# Altium PCB main.PcbDoc (part 2 of 2)
Units mil, origin at the board's own origin, x right, y up, seen from the top; angles counter-clockwise.
Board outline 2900 x 2350 mil, 2 copper layers (Top Layer, Bottom Layer); 128 components, 79 nets, 285 pads, 6 vias.
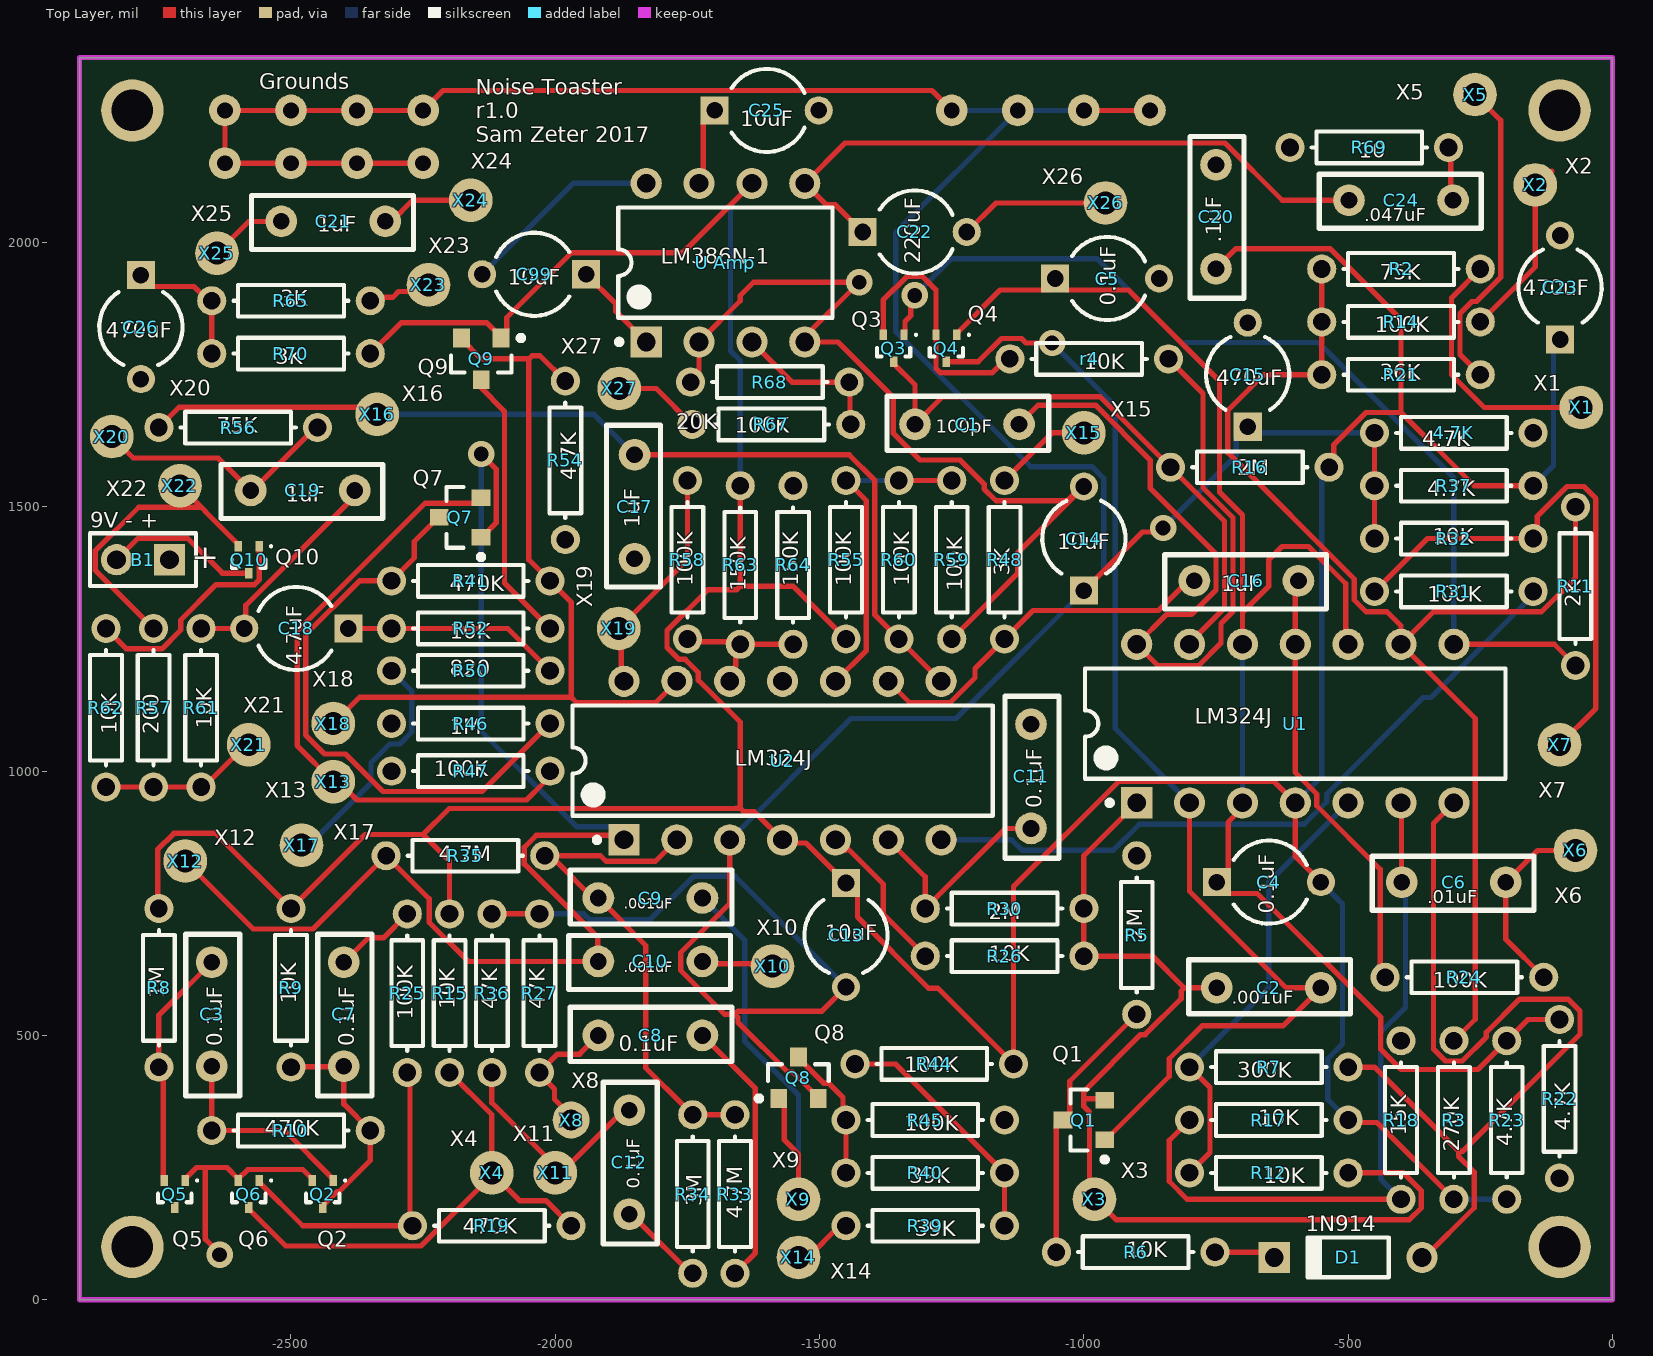
[diagram p0: Top Layer view]

## Part data (continued)
R18: library part Res1, "Resistor", Manufacturer="Vishay / Dale", Manufacturer Part Number=CMF5515K000FHEB, Operating Temperature Range="- 55 C to + 175 C", Power Rating="500 mW (1/2 W)", Resistance="15 kOhms", Supplier Part Number 1=71-CMF5515K000FHEB, Temperature Coefficient="50 PPM / C", Tolerance="1 %", Voltage Rating="250 V", Brand="Vishay / Dale", Category="Metal Film Resistors - Through Hole", ComponentLink1Description=http://www.mouser.com/ds/2/427/cmfind-239942.pdf, ComponentLink1URL=http://www.mouser.com/ds/2/427/cmfind-239942.pdf, Diameter="2.29 mm", LatestRevisionDate=17-Jul-2002, LatestRevisionNote="Re-released for DXP Platform.", Lead Diameter="0.64 mm", Length="6.1 mm", Minimum Order Quantity=1, PackageDescription="Axial Device, Thru-Hole; 2 Leads; 0.3 in Pin Spacing", PackageReference=AXIAL-0.3, Packaging=Reel, Pricing 1="1=0.350, 50=0.266, 100=0.168, 500=0.144, 1000=0.100, 2000=0.093, 5000=0.084, 10000=0.082, 25000=0.080 (USD)", Product="Metal Film Resistors Controlled Temp Coefficient", Published=8-Jun-2000, Publisher="Altium Limited", Reeling=True, RoHS="RoHS Compliant", RoHS - Mouser=Y, Series="CMF Industrial", Standard Pack Qty=1000, Stock 1=2476, Supplier 1=Mouser, Termination Style=Axial, Type="Metal Film Resistors, Industrial, Precision"
R21: library part Res1, "Resistor", Manufacturer="KOA Speer", Manufacturer Part Number=MF1/4DC3602F, Operating Temperature Range="- 55 C to + 155 C", Power Rating="250 mW (1/4 W)", Resistance="36 kOhms", Supplier Part Number 1=660-MF1/4DC3602F, Temperature Coefficient="100 PPM / C", Tolerance="1 %", Voltage Rating="500 V", Brand="KOA Speer", Category="Metal Film Resistors - Through Hole", ComponentLink1Description=http://www.mouser.com/ds/2/219/MF-MFS-RK-18760.pdf, ComponentLink1URL=http://www.mouser.com/ds/2/219/MF-MFS-RK-18760.pdf, Diameter="2.3 mm", LatestRevisionDate=17-Jul-2002, LatestRevisionNote="Re-released for DXP Platform.", Lead Spacing="30 mm", Length="7.1 mm", Minimum Order Quantity=1, PackageDescription="Axial Device, Thru-Hole; 2 Leads; 0.3 in Pin Spacing", PackageReference=AXIAL-0.3, Packaging=Bulk, Pricing 1="1=0.230, 10=0.055, 100=0.019, 1000=0.014, 2000=0.009, 10000=0.008, 25000=0.007, 50000=0.006 (USD)", Product="Metal Film Resistors General Purpose", Published=8-Jun-2000, Publisher="Altium Limited", Reeling=False, RoHS="RoHS Compliant", RoHS - Mouser=Y, Series=MF, Standard Pack Qty=1000, Stock 1=7576, Supplier 1=Mouser, Termination Style=Axial, Type="Semi-precision metal film resistors"
R24 R31: library part Res1, "Resistor", Manufacturer="Vishay / Dale", Manufacturer Part Number=CMF55100K00FHEK, Operating Temperature Range="- 55 C to + 175 C", Power Rating="500 mW (1/2 W)", Resistance="100 kOhms", Supplier Part Number 1=71-CMF55100K00BEEB, Temperature Coefficient="50 PPM / C", Tolerance="1 %", Voltage Rating="250 V", Brand="Vishay / Dale", Category="Metal Film Resistors - Through Hole", ComponentLink1Description=http://www.mouser.com/ds/2/427/cmfind-239942.pdf, ComponentLink1URL=http://www.mouser.com/ds/2/427/cmfind-239942.pdf, Diameter="2.29 mm", LatestRevisionDate=17-Jul-2002, LatestRevisionNote="Re-released for DXP Platform.", Lead Diameter="0.64 mm", Length="6.1 mm", Minimum Order Quantity=1, PackageDescription="Axial Device, Thru-Hole; 2 Leads; 0.3 in Pin Spacing", PackageReference=AXIAL-0.3, Packaging=Bulk, Pricing 1="1=0.230, 25=0.181, 100=0.132, 500=0.115, 1000=0.099, 2000=0.092, 5000=0.087, 10000=0.082, 25000=0.072 (USD)", Pricing 2="1=0.710, 50=0.650, 100=0.491, 500=0.408, 1000=0.302, 2000=0.294, 5000=0.288, 10000=0.279, 25000=0.272 (USD)", Product="Metal Film Resistors Controlled Temp Coefficient", Published=8-Jun-2000, Publisher="Altium Limited", Reeling=False, RoHS="RoHS Compliant", RoHS - Mouser=Y, Series="CMF Industrial", Standard Pack Qty=100, Stock 1=4041, Stock 2=1499, Supplier 1=Mouser, Supplier Part Number 2=71-CMF55100K00BEEB, Termination Style=Axial, Type="Metal Film Resistors, Industrial, Precision"
R27: library part Res1, "Resistor", Manufacturer Part Number=CMF5547K000FHEK, Supplier Part Number 1=71-CMF5547K000FHEK, Category="Metal Film Resistors - Through Hole", ComponentLink1Description=http://www.mouser.com/ds/2/427/cmfind-239942.pdf, ComponentLink1URL=http://www.mouser.com/ds/2/427/cmfind-239942.pdf, Diameter="2.29 mm", LatestRevisionDate=17-Jul-2002, LatestRevisionNote="Re-released for DXP Platform.", Lead Diameter="0.64 mm", PackageDescription="Axial Device, Thru-Hole; 2 Leads; 0.3 in Pin Spacing", PackageReference=AXIAL-0.3, Published=8-Jun-2000, Publisher="Altium Limited", Supplier 1=Mouser
R30: library part Res1, "Resistor", Manufacturer="Vishay / Dale", Manufacturer Part Number=CMF5512M000FKEK, Maximum Operating Temperature="+ 175 C", Minimum Operating Temperature="- 55 C", Operating Temperature Range="- 55 C to + 175 C", Power Rating="500 mW", Resistance="12 MOhms", Supplier Part Number 1=71-CMF5512M000FKEK, Temperature Coefficient="100 PPM / C", Tolerance="1 %", Voltage Rating="250 V", Brand="Vishay / Dale", Category="Metal Film Resistors - Through Hole", ComponentLink1Description=http://www.mouser.com/ds/2/427/cmfind-239942.pdf, ComponentLink1URL=http://www.mouser.com/ds/2/427/cmfind-239942.pdf, Diameter="2.29 mm", LatestRevisionDate=17-Jul-2002, LatestRevisionNote="Re-released for DXP Platform.", Length="6.1 mm", Minimum Order Quantity=1, PackageDescription="Axial Device, Thru-Hole; 2 Leads; 0.3 in Pin Spacing", PackageReference=AXIAL-0.3, Packaging=Bulk, Pricing 1="1=1.59, 5=1.47, 10=1.40, 25=1.27, 50=1.21, 100=1.15, 200=0.990, 500=0.960, 1000=0.920 (USD)", Product="Metal Film Resistors Controlled Temp Coefficient", Product Status="New at Mouser", Published=8-Jun-2000, Publisher="Altium Limited", Reeling=False, RoHS="RoHS Compliant", RoHS - Mouser=Y, Series="CMF Industrial", Standard Pack Qty=100, Stock 1=94, Supplier 1=Mouser, Termination Style=Axial, Type="Metal Film Resistors, Industrial, Precision"
R33: library part Res1, "Resistor", Supplier Part Number 1=660-CFS1/4CT52R475J, LatestRevisionDate=17-Jul-2002, LatestRevisionNote="Re-released for DXP Platform.", PackageDescription="Axial Device, Thru-Hole; 2 Leads; 0.3 in Pin Spacing", PackageReference=AXIAL-0.3, Published=8-Jun-2000, Publisher="Altium Limited", Supplier 1=Mouser
R34: library part Res1, "Resistor", Manufacturer="Vishay / Dale", Manufacturer Part Number=CMF553M0000FKEK, Operating Temperature Range="- 55 C to + 175 C", Power Rating="500 mW (1/2 W)", Resistance="3 MOhms", Supplier Part Number 1=71-CMF553M0000FKEK, Temperature Coefficient="100 PPM / C", Tolerance="1 %", Voltage Rating="250 V", Brand="Vishay / Dale", Category="Metal Film Resistors - Through Hole", ComponentLink1Description=http://www.mouser.com/ds/2/427/cmfind-239942.pdf, ComponentLink1URL=http://www.mouser.com/ds/2/427/cmfind-239942.pdf, Diameter="2.29 mm", LatestRevisionDate=17-Jul-2002, LatestRevisionNote="Re-released for DXP Platform.", Lead Diameter="0.64 mm", Length="6.1 mm", Minimum Order Quantity=1, PackageDescription="Axial Device, Thru-Hole; 2 Leads; 0.3 in Pin Spacing", PackageReference=AXIAL-0.3, Packaging=Bulk, Pricing 1="1=0.510, 50=0.503, 100=0.493, 500=0.481, 1000=0.418, 2000=0.405, 5000=0.393, 10000=0.381, 25000=0.380 (USD)", Product="Metal Film Resistors Controlled Temp Coefficient", Published=8-Jun-2000, Publisher="Altium Limited", Reeling=False, RoHS="RoHS Compliant", RoHS - Mouser=Y, Series="CMF Industrial", Standard Pack Qty=100, Stock 1=575, Supplier 1=Mouser, Termination Style=Axial, Type="Metal Film Resistors, Industrial, Precision"
R35: library part Res1, "Resistor", Manufacturer="KOA Speer", Manufacturer Part Number=CFS1/4CT52R475J, Operating Temperature Range="- 55 C to + 155 C", Power Rating="250 mW (1/4 W)", Resistance="4.7 MOhms", Supplier Part Number 1=660-CFS1/4CT52R475J, Tolerance="5 %", Voltage Rating="250 V", Brand="KOA Speer", Category="Carbon Film Resistors - Through Hole", ComponentLink1Description=http://www.mouser.com/ds/2/219/CF-6922.pdf, ComponentLink1URL=http://www.mouser.com/ds/2/219/CF-6922.pdf, Diameter="1.7 mm", LatestRevisionDate=17-Jul-2002, LatestRevisionNote="Re-released for DXP Platform.", Length="3.2 mm", Minimum Order Quantity=1, PackageDescription="Axial Device, Thru-Hole; 2 Leads; 0.3 in Pin Spacing", PackageReference=AXIAL-0.3, Packaging=Reel, Pricing 1="1=0.150, 5000=0.030, 10000=0.018, 50000=0.014, 100000=0.010 (USD)", Published=8-Jun-2000, Publisher="Altium Limited", Qualification=AEC-Q200, Reeling=True, RoHS="RoHS Compliant", RoHS - Mouser=Y, Series=CF, Standard Pack Qty=5000, Stock 1=14824, Supplier 1=Mouser, Termination Style=Axial, Type="Carbon Film Leaded Resistor"
R36: library part Res1, "Resistor", Manufacturer="Vishay / Dale", Manufacturer Part Number=CMF5547K000FHEK, Operating Temperature Range="- 55 C to + 175 C", Power Rating="500 mW (1/2 W)", Resistance="47 kOhms", Supplier Part Number 1=71-CMF5547K000FHEK, Temperature Coefficient="50 PPM / C", Tolerance="1 %", Voltage Rating="250 V", Brand="Vishay / Dale", Category="Metal Film Resistors - Through Hole", ComponentLink1Description=http://www.mouser.com/ds/2/427/cmfind-239942.pdf, ComponentLink1URL=http://www.mouser.com/ds/2/427/cmfind-239942.pdf, Diameter="2.29 mm", LatestRevisionDate=17-Jul-2002, LatestRevisionNote="Re-released for DXP Platform.", Lead Diameter="0.64 mm", Length="6.1 mm", Minimum Order Quantity=1, PackageDescription="Axial Device, Thru-Hole; 2 Leads; 0.3 in Pin Spacing", PackageReference=AXIAL-0.3, Packaging=Bulk, Pricing 1="1=0.420, 25=0.242, 100=0.152, 500=0.131, 1000=0.100, 2000=0.093, 5000=0.084 (USD)", Product="Metal Film Resistors Controlled Temp Coefficient", Published=8-Jun-2000, Publisher="Altium Limited", Reeling=False, RoHS="RoHS Compliant", RoHS - Mouser=Y, Series="CMF Industrial", Standard Pack Qty=100, Stock 1=569, Supplier 1=Mouser, Termination Style=Axial, Type="Metal Film Resistors, Industrial, Precision"
R39 R40: library part Res1, "Resistor", Manufacturer="Vishay / Dale", Manufacturer Part Number=CMF5539K200DHR6, Operating Temperature Range="- 55 C to + 175 C", Power Rating="500 mW (1/2 W)", Resistance="39.2 kOhms", Supplier Part Number 1=71-CMF5539K200DHR6, Temperature Coefficient="50 PPM / C", Tolerance="0.5 %", Voltage Rating="250 V", Brand="Vishay / Dale", Category="Metal Film Resistors - Through Hole", ComponentLink1Description=http://www.mouser.com/ds/2/427/cmfind-239942.pdf, ComponentLink1URL=http://www.mouser.com/ds/2/427/cmfind-239942.pdf, Diameter="2.29 mm", LatestRevisionDate=17-Jul-2002, LatestRevisionNote="Re-released for DXP Platform.", Length="6.1 mm", Minimum Order Quantity=1, PackageDescription="Axial Device, Thru-Hole; 2 Leads; 0.3 in Pin Spacing", PackageReference=AXIAL-0.3, Packaging=Reel, Pricing 1="1=0.230, 50=0.225, 100=0.220, 500=0.193, 1000=0.181, 4000=0.171, 8000=0.160, 12000=0.146, 20000=0.135 (USD)", Product="Metal Film Resistors Controlled Temp Coefficient", Published=8-Jun-2000, Publisher="Altium Limited", Reeling=True, RoHS=No, RoHS - Mouser=N, Series="CMF Industrial", Standard Pack Qty=1000, Stock 1=502, Supplier 1=Mouser, Termination Style=Axial, Type="Metal Film Resistors, Industrial, Precision"
R48 R65 R70: library part Res1, "Resistor", Manufacturer="Vishay / Dale", Manufacturer Part Number=CMF073K0000JNEK, Operating Temperature Range="- 55 C to + 175 C", Power Rating="500 mW (1/2 W)", Resistance="3 kOhms", Supplier Part Number 1=71-CMF073K0000JNEK, Temperature Coefficient="200 PPM / C", Tolerance="5 %", Voltage Rating="250 V", Brand="Vishay / Dale", Category="Metal Film Resistors - Through Hole", ComponentLink1Description=http://www.mouser.com/ds/2/427/cmfind-239942.pdf, ComponentLink1URL=http://www.mouser.com/ds/2/427/cmfind-239942.pdf, Diameter="2.29 mm", LatestRevisionDate=17-Jul-2002, LatestRevisionNote="Re-released for DXP Platform.", Lead Diameter="0.64 mm", Length="6.1 mm", Minimum Order Quantity=1, PackageDescription="Axial Device, Thru-Hole; 2 Leads; 0.3 in Pin Spacing", PackageReference=AXIAL-0.3, Packaging=Bulk, Pricing 1="1=0.450, 25=0.324, 50=0.198, 100=0.147, 500=0.106, 1000=0.082, 2500=0.078, 5000=0.077, 10000=0.075 (USD)", Product="Metal Film Resistors Controlled Temp Coefficient", Published=8-Jun-2000, Publisher="Altium Limited", Reeling=False, RoHS="RoHS Compliant", RoHS - Mouser=Y, Series="CMF Industrial", Standard Pack Qty=100, Stock 1=1543, Supplier 1=Mouser, Termination Style=Axial, Type="Metal Film Resistors, Industrial, Precision"
R50: library part Res1, "Resistor", Manufacturer="KOA Speer", Manufacturer Part Number=CF1/2C821J, Operating Temperature Range="- 55 C to + 155 C", Power Rating="500 mW (1/2 W)", Resistance="820 Ohms", Supplier Part Number 1=660-CF1/2C821J, Temperature Coefficient="- 450 PPM / C, + 350 PPM / C", Tolerance="5 %", Voltage Rating="400 V", Brand="KOA Speer", Category="Carbon Film Resistors - Through Hole", ComponentLink1Description=http://www.mouser.com/ds/2/219/CF-6922.pdf, ComponentLink1URL=http://www.mouser.com/ds/2/219/CF-6922.pdf, Diameter="3 mm", LatestRevisionDate=17-Jul-2002, LatestRevisionNote="Re-released for DXP Platform.", Length="8.5 mm", Minimum Order Quantity=1, PackageDescription="Axial Device, Thru-Hole; 2 Leads; 0.3 in Pin Spacing", PackageReference=AXIAL-0.3, Packaging=Bulk, Pricing 1="1=0.370, 100=0.058, 500=0.035, 1000=0.025, 5000=0.020, 10000=0.018, 25000=0.015, 50000=0.013, 100000=0.012 (USD)", Published=8-Jun-2000, Publisher="Altium Limited", Qualification=AEC-Q200, Reeling=False, RoHS="RoHS Compliant", RoHS - Mouser=Y, Series=CF, Standard Pack Qty=1000, Stock 1=13076, Supplier 1=Mouser, Termination Style=Axial, Type="Carbon Film Leaded Resistor"
R55 R59 R60: library part Res1, "Resistor", Manufacturer="Vishay / Dale", Manufacturer Part Number=CMF55100K00FHEK, Operating Temperature Range="- 55 C to + 175 C", Power Rating="500 mW (1/2 W)", Resistance="100 kOhms", Supplier Part Number 1=71-CMF50100K00FHEB, Temperature Coefficient="50 PPM / C", Tolerance="1 %", Voltage Rating="250 V", Brand="Vishay / Dale", Category="Metal Film Resistors - Through Hole", ComponentLink1Description=http://www.mouser.com/ds/2/427/cmfind-239942.pdf, ComponentLink1URL=http://www.mouser.com/ds/2/427/cmfind-239942.pdf, Diameter="2.29 mm", LatestRevisionDate=17-Jul-2002, LatestRevisionNote="Re-released for DXP Platform.", Lead Diameter="0.64 mm", Length="6.1 mm", Minimum Order Quantity=1, PackageDescription="Axial Device, Thru-Hole; 2 Leads; 0.3 in Pin Spacing", PackageReference=AXIAL-0.3, Packaging=Bulk, Pricing 1="1=0.230, 25=0.181, 100=0.132, 500=0.115, 1000=0.099, 2000=0.092, 5000=0.087, 10000=0.082, 25000=0.072 (USD)", Pricing 2="1=0.770, 10=0.460, 50=0.400, 100=0.287, 500=0.233, 1000=0.168, 2000=0.163, 5000=0.160, 10000=0.153 (USD)", Product="Metal Film Resistors Controlled Temp Coefficient", Published=8-Jun-2000, Publisher="Altium Limited", Reeling=False, RoHS="RoHS Compliant", RoHS - Mouser=Y, Series="CMF Industrial", Standard Pack Qty=100, Stock 1=4041, Stock 2=935, Supplier 1=Mouser, Supplier Part Number 2=71-CMF50100K00FHEB, Termination Style=Axial, Type="Metal Film Resistors, Industrial, Precision"
R56: library part Res1, "Resistor", Manufacturer=Yageo, Manufacturer Part Number=FMP200FRF52-75K, Operating Temperature Range="- 55 C to + 175 C", Power Rating="500 mW (1/2 W)", Resistance="5 kOhms", Supplier Part Number 1=71-CMF075K0000JNEK, Temperature Coefficient="200 PPM / C", Tolerance="5 %", Voltage Rating="250 V", Brand="Vishay / Dale", Category="Metal Film Resistors - Through Hole", ComponentLink1Description=http://www.mouser.com/ds/2/427/cmfind-239942.pdf, ComponentLink1URL=http://www.mouser.com/ds/2/427/cmfind-239942.pdf, Diameter="2.29 mm", LatestRevisionDate=17-Jul-2002, LatestRevisionNote="Re-released for DXP Platform.", Lead Diameter="0.64 mm", Length="6.1 mm", Minimum Order Quantity=1, PackageDescription="Axial Device, Thru-Hole; 2 Leads; 0.3 in Pin Spacing", PackageReference=AXIAL-0.3, Packaging=Bulk, Pricing 1="1=0.320, 25=0.300, 50=0.184, 100=0.116, 500=0.099, 1000=0.076, 2500=0.071, 5000=0.064 (USD)", Product="Metal Film Resistors Controlled Temp Coefficient", Published=8-Jun-2000, Publisher="Altium Limited", Reeling=False, RoHS="RoHS Compliant", RoHS - Mouser=Y, Series="CMF Industrial", Standard Pack Qty=100, Stock 1=227, Supplier 1=Mouser, Termination Style=Axial, Type="Metal Film Resistors, Industrial, Precision"
R57: library part Res1, "Resistor", Manufacturer="Vishay / Dale", Manufacturer Part Number=CMF50200R00FHEB, Operating Temperature Range="- 55 C to + 175 C", Power Rating="250 mW (1/4 W)", Resistance="200 Ohms", Supplier Part Number 1=71-CMF50200R00FHEB, Temperature Coefficient="50 PPM / C", Tolerance="1 %", Voltage Rating="200 V", Brand="Vishay / Dale", Category="Metal Film Resistors - Through Hole", ComponentLink1Description=http://www.mouser.com/ds/2/427/cmfind-239942.pdf, ComponentLink1URL=http://www.mouser.com/ds/2/427/cmfind-239942.pdf, Diameter="1.65 mm", LatestRevisionDate=17-Jul-2002, LatestRevisionNote="Re-released for DXP Platform.", Lead Diameter="0.41 mm", Length="3.81 mm", Minimum Order Quantity=1, PackageDescription="Axial Device, Thru-Hole; 2 Leads; 0.3 in Pin Spacing", PackageReference=AXIAL-0.3, Packaging=Reel, Pricing 1="1=0.390, 50=0.338, 100=0.278, 500=0.242, 1000=0.217, 2000=0.193, 5000=0.187, 10000=0.181, 25000=0.175 (USD)", Product="Metal Film Resistors Controlled Temp Coefficient", Published=8-Jun-2000, Publisher="Altium Limited", Reeling=True, RoHS="RoHS Compliant", RoHS - Mouser=Y, Series="CMF Industrial", Standard Pack Qty=1000, Stock 1=881, Supplier 1=Mouser, Termination Style=Axial, Type="Metal Film Resistors, Industrial, Precision"
R63 R64: library part Res1, "Resistor", Manufacturer="Vishay / Dale", Manufacturer Part Number=CMF55150K00DHR6, Operating Temperature Range="- 55 C to + 175 C", Power Rating="500 mW (1/2 W)", Resistance="150 kOhms", Supplier Part Number 1=71-CMF55150K00DHR6, Temperature Coefficient="50 PPM / C", Tolerance="0.5 %", Voltage Rating="250 V", Brand="Vishay / Dale", Category="Metal Film Resistors - Through Hole", ComponentLink1Description=http://www.mouser.com/ds/2/427/cmfind-239942.pdf, ComponentLink1URL=http://www.mouser.com/ds/2/427/cmfind-239942.pdf, Diameter="2.29 mm", LatestRevisionDate=17-Jul-2002, LatestRevisionNote="Re-released for DXP Platform.", Length="6.1 mm", Minimum Order Quantity=1, PackageDescription="Axial Device, Thru-Hole; 2 Leads; 0.3 in Pin Spacing", PackageReference=AXIAL-0.3, Packaging=Reel, Pricing 1="1=0.230, 50=0.225, 100=0.220, 500=0.193, 1000=0.181, 4000=0.171, 8000=0.160, 12000=0.146, 20000=0.135 (USD)", Product="Metal Film Resistors Controlled Temp Coefficient", Published=8-Jun-2000, Publisher="Altium Limited", Reeling=True, RoHS=No, RoHS - Mouser=N, Series="CMF Industrial", Standard Pack Qty=1000, Stock 1=987, Supplier 1=Mouser, Termination Style=Axial, Type="Metal Film Resistors, Industrial, Precision"
R68: library part Res1, "Resistor", Manufacturer="Vishay / Dale", Manufacturer Part Number=CMF5520K000FHEB, Operating Temperature Range="- 55 C to + 175 C", Power Rating="500 mW (1/2 W)", Resistance="20 kOhms", Supplier Part Number 1=71-CMF5520K000FHEB, Temperature Coefficient="50 PPM / C", Tolerance="1 %", Voltage Rating="250 V", Brand="Vishay / Dale", Category="Metal Film Resistors - Through Hole", ComponentLink1Description=http://www.mouser.com/ds/2/427/cmfind-239942.pdf, ComponentLink1URL=http://www.mouser.com/ds/2/427/cmfind-239942.pdf, Diameter="2.29 mm", LatestRevisionDate=17-Jul-2002, LatestRevisionNote="Re-released for DXP Platform.", Lead Diameter="0.64 mm", Length="6.1 mm", Minimum Order Quantity=1, PackageDescription="Axial Device, Thru-Hole; 2 Leads; 0.3 in Pin Spacing", PackageReference=AXIAL-0.3, Packaging=Reel, Pricing 1="1=0.350, 50=0.266, 100=0.168, 500=0.144, 1000=0.100, 2000=0.093, 5000=0.084, 10000=0.082, 25000=0.080 (USD)", Product="Metal Film Resistors Controlled Temp Coefficient", Published=8-Jun-2000, Publisher="Altium Limited", Reeling=True, RoHS="RoHS Compliant", RoHS - Mouser=Y, Series="CMF Industrial", Standard Pack Qty=1000, Stock 1=2368, Supplier 1=Mouser, Termination Style=Axial, Type="Metal Film Resistors, Industrial, Precision"
R69: library part Res1, "Metal Film Resistors - Through Hole 1/4watt 10Kohms 5% Rated to 1/2watt", Manufacturer="Vishay / Dale", Manufacturer Part Number=CMF5010R000FHEB, Operating Temperature Range="- 55 C to + 175 C", Power Rating="250 mW (1/4 W)", Resistance="10 Ohms", Supplier Part Number 1=71-CMF5010R000FHEB, Temperature Coefficient="50 PPM / C", Tolerance="1 %", Voltage Rating="200 V", Brand="Vishay / Dale", Category="Metal Film Resistors - Through Hole", ComponentLink1Description=http://www.mouser.com/ds/2/427/cmfind-239942.pdf, ComponentLink1URL=http://www.mouser.com/ds/2/427/cmfind-239942.pdf, Diameter="1.65 mm", LatestRevisionDate=17-Jul-2002, LatestRevisionNote="Re-released for DXP Platform.", Lead Diameter="0.41 mm", Length="3.81 mm", Minimum Order Quantity=1, PackageDescription="Axial Device, Thru-Hole; 2 Leads; 0.3 in Pin Spacing", PackageReference=AXIAL-0.3, Packaging=Reel, Pricing 1="1=0.390, 10=0.330, 50=0.270, 100=0.240, 500=0.218, 1000=0.194, 2000=0.188, 5000=0.182, 10000=0.175 (USD)", Product="Metal Film Resistors Controlled Temp Coefficient", Published=8-Jun-2000, Publisher="Altium Limited", Reeling=True, RoHS="RoHS Compliant", RoHS - Mouser=Y, Series="CMF Industrial", Standard Pack Qty=1000, Stock 1=755, Supplier 1=Mouser, Termination Style=Axial, Type="Metal Film Resistors, Industrial, Precision"
U1 U2: "Low Power Quad Operational Amplifier, 14-pin CerDIP", Dual Supply Voltage="+/- 3 V, +/- 5 V, +/- 9 V", Ib - Input Bias Current="250 nA", Manufacturer="National Semiconductor", Manufacturer Part Number=LM324N, Maximum Dual Supply Voltage="+/- 16 V", Maximum Operating Temperature="+ 70 C", Minimum Dual Supply Voltage="+/- 1.5 V", Minimum Operating Temperature="0 C", Operating Supply Current="175 uA", Operating Supply Voltage="3 V to 32 V, +/- 1.5 V to +/- 16 V", Output Current per Channel="40 mA", Package / Case=DIP-14, PackageTopMarking=NSUZXYYTT*LM324J, Pd - Power Dissipation="1310 mW", PowerWise=N, PSRR - Power Supply Rejection Ratio="65 dB", Supplier Part Number 1=512-LM324N, Supply Voltage - Max="32 V", Supply Voltage - Min="3 V", Voltage Gain dB="100 dB", Vos - Input Offset Voltage="7 mV", Amplifier Type="High Gain Amplifier", Brand="ON Semiconductor / Fairchild", Category="Operational Amplifiers - Op Amps", CMRR - Common Mode Rejection Ratio="65 dB", ComponentLink1Description="Manufacturer URL", ComponentLink1URL=http://www.national.com/, ComponentLink2Description="LM324 Datasheet", ComponentLink2URL=http://www.national.com/ds/LM/LM324.pdf, ComponentLink3Description="LM324 Web Page", ComponentLink3URL=http://www.national.com/pf/LM/LM324.html, ComponentLink4Description="J14A Package Page", ComponentLink4URL=http://www.national.com/packaging/folders/j14a.html, ComponentLink5Description=http://www.mouser.com/ds/2/308/LM324-1120928.pdf, ComponentLink5URL=http://www.mouser.com/ds/2/308/LM324-1120928.pdf, CompType=Amplifiers, DatasheetVersion=Aug-2000, Height="3.56 mm (Max)", High-Reliability=Y, Input Type=Rail-to-Rail, Length="19.56 mm (Max)", Minimum Order Quantity=1, Mounting Style="Through Hole", Number of Channels="4 Channel", PackageDescription="Cerdip, .400 x .310in Body, 14 Lead, .300in Centers, .100in Pitch", PackageReference=J14A, PackageVersion="revJ, Jul-2002", Packaging=Tube, PartNumber=LM324J, PinCount=14, Pricing 1="1=0.460, 10=0.380, 100=0.232, 1000=0.179, 2500=0.153, 10000=0.143, 25000=0.135, 50000=0.132 (USD)", Product="Operational Amplifiers", Reeling=False, RoHS=N, RoHS - Mouser=Y, Series=LM324, Shutdown="No Shutdown", Standard Pack Qty=25, Supplier 1=Mouser, Supply Type="Single, Dual", Technology=Bipolar, Width="6.6 mm (Max)"
  U1: Stock 1=11032
  U2: Stock 1=11024
"U Amp": "Low Voltage Audio Power Amplifier, 8-pin MDIP", Manufacturer="National Semiconductor", Manufacturer Part Number=LM386N-1/NOPB, Maximum Operating Temperature="+ 70 C", Minimum Operating Temperature="0 C", Operating Supply Current="4 mA", Operating Supply Voltage="4 V to 12 V", Output Power="325 mW", Package / Case=PDIP-8, PackageTopMarking=NSUZXYTTE#*LM*386N-1, Pd - Power Dissipation="1.25 W", PowerWise=N, PSRR - Power Supply Rejection Ratio="50 dB", Supplier Part Number 1=926-LM386N-1/NOPB, Supply Voltage - Max="18 V", Supply Voltage - Min="4 V", Audio - Load Impedance="4 ohm", Brand="Texas Instruments", Category="Audio Amplifiers", Class=Class-AB, Code_JEDEC=MS-001-BA, ComponentLink1Description="Manufacturer URL", ComponentLink1URL=http://www.national.com/, ComponentLink2Description="LM386 Datasheet", ComponentLink2URL=http://www.national.com/ds/LM/LM386.pdf, ComponentLink3Description="LM386 Web Page", ComponentLink3URL=http://www.national.com/pf/LM/LM386.html, ComponentLink4Description="N08E Package Page", ComponentLink4URL=http://www.national.com/packaging/folders/n08e.html, CompType="Audio IC", DatasheetVersion=Aug-2000, Gain="20 dB", High-Reliability=Y, Input Type=Analog, Minimum Order Quantity=1, Mounting Style="Through Hole", Number of Channels="1 Channel", PackageDescription="MDIP, .365 x .250 x .130in, 8 Lead, .100in Pitch", PackageReference=N08E, PackageVersion="revG, May-2006", Packaging=Tube, PartNumber=LM386N-1, PinCount=8, Pricing 1="1=0.970, 10=0.829, 100=0.636, 500=0.562, 1000=0.444, 2500=0.394, 10000=0.379, 25000=0.367 (USD)", Product="Audio Amplifiers", Reeling=False, RoHS=N, RoHS - Mouser=Y, Series=LM386, Standard Pack Qty=40, Stock 1=14339, Supplier 1=Mouser, THD plus Noise=-, Type="1-Channel Mono"
X1 X2 X3 X4 X5 X6 X7 X8 X9 X10 X11 X12 X13 X14 X15 X16 X17 X18 X19 X20 X21 X22 X23 X24 X25 X26 X27: library part Pad

## Free pads (board coordinates)
  round 118.11 hole 78.74: 2(-2800,100) 2(-2800,2250) 2(-100,100) 2(-100,2250)
  round 60 hole 30: 3(-2625,2250) 3(-2500,2250) 8(-2625,2150) 9(-2500,2150) 9(-2375,2250) 10(-2375,2150) 10(-2250,2250) 10(-1250,2250) 10(-1125,2250) 10(-1000,2250) 10(-875,2250) 11(-2250,2150)

## Via types
v1: diameter 50, hole 28, Top Layer to Bottom Layer, 3 vias
v2: diameter 50, hole 28, Top Layer to Bottom Layer, tented both sides, 3 vias

## Nets (pads, with @x,y where several pads share a name; then routed paths per layer and width w, separated by ;. In a path a pad name is that pad's centre, name@x,y a point inside that pad or via, vN(x,y) a via of type N, cw(c..) or ccw(c..) an arc to the next point about the centre after c; other vN are vias at no path point)
BN: 4.7K.2 "U Amp.2" "U Amp.4" B1.2 C5.2 C11.1 C14.2 C15.2 C16.1 C18.2 C19.1 C20.1 C23.2 C25.2 C26.2 Q2.2 Q5.1 Q6.2 Q10.3 R5.1 R18.2 R22.1 R24.2 R45.1 R46.1 R47.1 R54.1 R59.1 R61.1 R64.2 R68.1 R69.1 U1.11 U2.11 | length 3704.9
  Top Layer w10: B1.2 -2789.47,1440.53 -2695.92,1440.53 -2629.9,1374.51 Q10.3 ; Q5.1 -2700.32,228.48 -2678.8,250 -2662.1,250 ; R61.1 C18.2 -2585.47,1272.96 -2585.47,1313.85 -2379.57,1519.74 C19.1 ; v1(-2635,85) -2635,87.38 -2662.1,114.47 -2662.1,250 ; Q6.2@-2600,225.81 -2600,228.8 -2621.2,250 -2662.1,250 ; Q6.2@-2600,228.17 -2581.68,246.49 -2477.69,246.49 -2459.69,228.48 Q2.2 ; R68.1 -1728,1752 -1728,1812 -1650,1890 -1650,1900 -1625,1925 v1(-1425,1925) -1528,1822 -1528,1812 -1465.47,1812 -1360.43,1706.96 -1360.43,1639.02 -1309.97,1588.56 -1234.03,1588.56 -1188.56,1543.09 -1188.56,1534.03 -1165.97,1511.44 -1031.81,1511.44 -1004.83,1538.43 C14.2 -1124.81,1413.61 -1124.81,1375.19 R59.1 ; C16.1 -600,1354 U1.11 -600,997.31 -559.47,956.79 -559.47,934.47 -439.43,814.43 -439.43,610 R24.2
BP: "U Amp.6" C4.2 C13.1 C20.2 C23.1 Q9.1 R3.2 R8.2 R9.2 R15.2 R16.1 R17.1 R23.1 R37.2 R44.1 R55.1 R63.2 R70.1 U1.4 U2.4 | length 8809.6
  Top Layer w10: R8.2 -2752.34,742.34 -2752.34,851.68 -2721.68,882.34 -2642.34,882.34 R9.2 -2360,880 -2250,880 ; R70.1 -2291.91,1848.09 -2129.35,1848.09 -2103.23,1821.97 Q9.1@-2100,1821.97 ; R15.2 -2200,830 -2250,880 ; Q9.1 -2091.85,1830.12 -2091.85,1858.43 -1969.76,1980.52 -1759.48,1980.52 -1628,2112 ; R63.2 -1650,1350 ; R55.1 -1550,1350 -1650,1350 ; C20.2@-750,1951.57 -749,1951.57 -712.02,1988.56 -534.03,1988.56 -400,1854.53 -400,1678.56 ; C4.2 -600,838.43 U1.4 -640.53,980.53 -934.08,980.53 -1133,781.61 -1133,466.84 -1139.1,460.74 -1147.74,460.74 -1276.26,589.26 -1293.79,589.26 -1428.43,723.89 -1428.43,766.85 -1525.47,863.9 -1563.9,863.9 -1622.93,922.93 -1642.93,922.93 -1650,930 ; R16.1 -527.37,1583.63 -527.37,1617.16 -465.97,1678.56 -400,1678.56 ; R17.1 -495.23,335.23 -445.23,335.23 R3.2 ; R37.2 -261.44,1540 -400,1678.56 ; -2250,880 -2200.56,929.44 -1658.84,929.44 -1658.28,930 -1650,930 ; -1650,930 -1650,1092.69 -1729.47,1172.16 -1729.47,1186.79 -1754.13,1211.44 -1765.97,1211.44 -1788.56,1234.03 -1788.56,1265.97 -1711.6,1342.93 -1657.07,1342.93 -1650,1350
  Bottom Layer w10: R63.2 -1650,1776.69 -1668.53,1795.21 -1668.53,2071.47 -1628,2112 ; U1.4 -550,990 -550,1561 R16.1 ; C4.2 -510.57,749 -510.57,483.96 -538.56,455.97 -538.56,378.56 R17.1 ; R3.2 R23.1 ; R37.2 -111.44,1578.56 -111.44,1804.13 C23.1
GND: 4.7K.1 C13.2 C14.1 C15.1 pad.3 pad.8 pad.9 pad.10 pad.11 Q8.2 R27.2 R32.2 R36.2 R37.1 U2.3 | length 6940.1
  Top Layer w10: pad.11 pad.8 -2625,2250 -2250,2250 -2212.43,2287.57 -1287.57,2287.57 pad.10@-1250,2250 ; R36.2 R27.2@-2040,730 ; U2.3 -1670,749.56 -1762.57,656.98 -1762.57,623.02 -1679.56,540 -1660,540 ; Q8.2 -1502.6,382.6 -1550.65,430.65 -1560.3,430.65 -1654.14,524.49 -1654.14,534.14 -1660,540 ; C13.2 -1495.72,545.86 -1654.14,545.86 -1660,540 ; C14.1 -889.23,1452.35 -857.65,1452.35 v1(-850,1460) ; pad.10@-1000,2250 pad.10@-875,2250 ; R32.2 4.7K.1
  Bottom Layer w10: R27.2@-2025,735 -2020,730 -1946.41,730 -1935.41,719 -1820.56,719 -1738.56,801 -1659.43,801 C13.2 ; U2.3 -1440.31,1099.69 -1241.88,1099.69 -962.43,1379.15 -962.43,1553.99 -984.44,1576 -1100.56,1576 -1356,1831.44 -1356,2019 pad.10@-1125,2250 ; pad.10@-1250,2250 pad.10@-1125,2250 ; pad.10@-1000,2250 pad.10@-1125,2250 ; v1(-850,1460) -711.57,1598.43 -711.57,1630 C15.1 -678.43,1640 4.7K.1
NetB1_1: B1.1
NetC1_1: C1.1 Q3.3 R16.2 U1.13 | length 1100.4
  Top Layer w10: Q3.3 -1360,1771.52 -1319.43,1730.94 C1.1 -1267.09,1708.34 -969.34,1708.34 -733.85,1472.85 -733.85,1308.72 -800,1242.57 U1.13
NetC1_2: C1.2 r4.1 U1.14 | length 1587.9
  Top Layer w10: C1.2 -1086.24,1692.34 -978.32,1692.34 -874.56,1588.58 -874.56,1535.47 -749.85,1410.76 -749.85,1343.02 -796.67,1296.2 -843.8,1296.2 U1.14 -859.47,1199.47 -783.21,1199.47 -740.53,1242.16 -740.53,1279.41 -717.85,1302.09 -717.85,1479.48 -774.61,1536.24 -774.61,1714.61 r4.1
NetC2_1: C2.1 Q1.2 R12.1 R26.1 R30.1 U1.1 X3.1 | length 1983
  Top Layer w10: Q1.2 -963.23,380 -1000,380 ; U1.1 -1000,840 -1000,640 -990,650 -870,650 -810,590 ; C2.1 -810,590 ; R12.1 -395.47,240 -361.44,205.97 -361.44,174.03 -384.03,151.44 -938.88,151.44 -977.44,190 X3.1 -989.35,199.35 -989.35,355.2 -1000,365.86 -1000,380 ; -1000,380 -1000,394.14 -892.7,501.44 -884.03,501.44 -815.86,569.61 -815.86,584.14 -810,590
NetC2_2: C2.2 Q1.1 Q4.3 U1.2 | length 2238.4
  Top Layer w10: Q4.3 -1200.02,1774.51 -1155.97,1818.56 -1117.68,1818.56 -1109.12,1810 v2(-1060,1810) ; Q1.1 -958.66,302.6 -838.56,422.7 -838.56,455.97 -776.33,518.2 -623.37,518.2 C2.2 -617.13,590 -800,772.87 U1.2
  Bottom Layer w10: v2(-1060,1810) -940.53,1690.53 -940.53,1080.53 U1.2
NetC3_1: C3.1 Q5.2 R8.1 | length 458.6
  Top Layer w10: Q5.2 -2741.69,227.5 -2741.69,431.69 R8.1 -2750,538.43 C3.1
NetC3_2: C3.2 Q2.1 R10.1 | length 392.2
  Top Layer w10: C3.2 R10.1 -2511.83,320 -2420.32,228.48 Q2.1
NetC4_1: C4.1 C5.1 Q4.1 R22.2 R23.2 U1.3 U1.10 U1.12 | length 2894.9
  Top Layer w10: Q4.1 -1240.32,1828.48 -1158.37,1910.43 -1065.57,1910.43 C5.1@-1056,1920 ; C5.1 -1032.85,1910.43 -915.89,1910.43 -743.57,1738.11 -743.57,1527.83 -700,1484.25 -700,1300 ; U1.3 -700,930.73 -726.85,903.88 -726.85,811.57 C4.1 -726.85,768.43 -672.02,768.43 -438.56,534.97 -438.56,474.03 -399.97,435.44 -254.56,435.44 -160,530 R22.2 ; U1.12 -700,1300 ; U1.10 -504.56,1244.56 -504.56,1354.56 -575,1425 -625,1425 -650,1400 -650,1350 -700,1300
  Bottom Layer w10: U1.3 U1.12
NetC6_1: C6.1 R24.1 X6.1 | length 366.1
  Top Layer w10: R24.1 -201.57,681.57 C6.1 -141.57,850 X6.1
NetC6_2: C6.2 R17.2 R18.1 U1.6 | length 1373.6
  Top Layer w10: R17.2 -838.56,301.44 -838.56,224.03 -804.53,190 R18.1 ; U1.6 -399.21,939.21 -399.21,790.79 C6.2
  Bottom Layer w10: R18.1 -438.56,228.56 -438.56,505.97 -391.44,553.09 -391.44,783.02 C6.2
NetC7_1: C7.1 R25.2 | length 157.9
  Top Layer w10: C7.1 -2353.75,684.68 -2325.32,684.68 R25.2
NetC7_2: C7.2 Q2.3 R9.1 R10.2 | length 428.2
  Top Layer w10: R9.1 -2499.21,440.79 -2400.79,440.79 C7.2 -2400,370 R10.2 -2350,263.24 -2408.75,204.49 -2413.01,204.49 -2440,177.5 Q2.3
NetC8_1: C8.1 R27.1 X8.1 | length 260.8
  Top Layer w10: X8.1@-1970,360 -1982.14,360 -2001.42,379.29 -2001.42,398.39 -2038.04,435 -2040,435 -2025,435 -1995.47,464.53 -1953.89,464.53 C8.1
NetC8_2: C8.2 R33.1 | length 518.5
  Top Layer w10: C8.2 -1621.44,399.87 -1621.44,88.56 -1653,57 R33.1@-1674,57
NetC9_1: C9.1 R33.2 R34.2 R35.1 U2.2 | length 960
  Top Layer w10: R35.1@-2020,820 -2009.34,830.66 -1999.87,830.66 -1929.21,760 C9.1 -1828.75,670.32 -1828.75,438.75 -1754.74,364.74 -1736.53,364.74 -1735.63,365.63 -1720,350 -1680.84,350 -1674,356.84 R33.2@-1674,357 ; R35.1 -1914.61,840 -1904.08,829.47 -1810.53,829.47 U2.2
NetC9_2: C9.2 Q8.1 X9.1 | length 851.3
  Top Layer w10: Q8.1 -1566.65,369.88 -1566.65,302.12 -1540,275.46 X9.1
  Bottom Layer w10: C9.2 -1641.34,679.76 -1641.34,488.62 -1540,387.28 X9.1
NetC10_1: C10.1 X10.1 | length 125.7
  Top Layer w10: C10.1 -1717.07,635.5 -1605.5,635.5 X10.1@-1600,630
NetC10_2: C10.2 Q7.1 R35.2 U2.1 X12.1 | length 2538.3
  Top Layer w10: X12.1 -2571.44,701.44 -2458.56,701.44 R35.2 -2238.56,758.56 -2238.56,714.03 -2164.53,640 C10.2 -1919.53,641.11 -1919.53,685 -2058.56,824.03 -2058.56,855.97 -2035.97,878.56 -1878.56,878.56 U2.1 ; Q7.1 -2138.66,1442.6 -2111.91,1469.35 -2111.91,1571.52 -2140,1599.6 v2(-2140,1600)
  Bottom Layer w10: v2(-2140,1600) -2140,1075.47 -1959.06,894.53 -1894.53,894.53 U2.1
NetC11_2: C11.2 R30.2 U2.6 | length 421.8
  Top Layer w10: U2.6 -1300,800 R30.2 -1148.43,891.57 C11.2
NetC12_1: C12.1 R36.1 X11.1 | length 442.8
  Top Layer w10: R36.1 -2120,372.63 -2000,252.63 X11.1 -1989.21,240 -1875,354.21 C12.1@-1844.21,354.21
NetC12_2: C12.2 R34.1 | length 162.7
  Top Layer w10: C12.2@-1860,141.57 -1854.23,147.35 -1841.56,147.35 -1744.21,50 R34.1
NetC16_2: C16.2 R48.1 U2.9 | length 701.6
  Top Layer w10: U2.9 -1329.47,1129.47 -1253.21,1129.47 -1205.92,1176.76 -1205.92,1194.08 -1096,1304 -858.63,1304 -802.63,1360 C16.2
NetC17_1: C17.1
NetC17_2: C17.2 R56.1 R60.2 U2.8 X16.1 | length 1859.3
  Top Layer w10: R56.1 -2711.44,1688.56 -2370.57,1688.56 -2356,1673.99 X16.1@-2356,1656 ; C17.2 -1443.89,1598.43 -1395.44,1549.97 -1395.44,1295.44 U2.8
  Bottom Layer w10: X16.1 -1926.57,1675 C17.2
NetC18_1: C18.1 R50.2 R52.1 | length 414.7
  Top Layer w10: C18.1 -2090,1270 R50.2
NetC19_2: C19.2 R56.2 X20.1 | length 471.8
  Top Layer w10: X20.1@-2834,1624 -2830,1624 -2798.34,1592.34 -2637.76,1592.34 C19.2 -2572.71,1531 -2453.71,1650 R56.2
NetC21_1: C21.1 X24.1 | length 178.1
  Top Layer w10: C21.1 -2310.12,2040 -2270.12,2080 X24.1
NetC21_2: C21.2 X25.1 | length 146.4
  Top Layer w10: X25.1 -2580,2040 C21.2
NetC22_1: "U Amp.5" C22.1 C24.2 | length 1262.1
  Top Layer w10: C22.1 -1470.52,2072.09 -1488.09,2072.09 -1528,2112 -1451.57,2188.43 -733.02,2188.43 -624.59,2080 -518.43,2080 C24.2@-498.43,2100
NetC22_2: C22.2 X26.1 | length 285.4
  Top Layer w10: C22.2 -1166.57,2075 X26.1
NetC24_1: C24.1 R69.2 | length 84.8
  Top Layer w10: C24.1@-301.57,2100 -302.69,2100 -305.79,2103.1 -305.79,2174.21 R69.2@-300,2180
NetC25_1: "U Amp.7" C25.1 | length 150.3
  Top Layer w10: -1728,2112 -1720,2120 -1720,2228.43 C25.1
NetC26_1: C26.1 R65.1 R70.2 | length 270.1
  Top Layer w10: C26.1@-2800,1938.43 -2778.43,1916.85 -2683.34,1916.85 -2656.49,1890 R65.1 R70.2
NetC99_1: "U Amp.1" C99.1 | length 175
  Top Layer w10: C99.1 -1886.26,1884.69 -1886.26,1870.26 -1828,1812
NetC99_2: "U Amp.8" C99.2 | length 381.7
  Bottom Layer w10: C99.2 -1966.43,2112 -1828,2112
NetD1_1: D1.1 R7.2 U1.7 | length 1728.3
  Top Layer w10: R7.2 -450,440 -291,281 ; D1.1 -355.47,80 -261.44,174.03 -261.44,241.44 -291,271 -291,281 ; U1.7 -338.56,901.44 -338.56,474.03 -315.97,451.44 -284.03,451.44 -238.56,496.91 -238.56,505.97 -175.97,568.56 -84.03,568.56 -61.44,545.97 -61.44,502.27 -282.72,281 -291,281
NetD1_2: D1.2 R6.2 | length 116.4
  Top Layer w10: R6.2 -649.76,90 D1.2
NetD2_1: 
NetD2_2: 
NetD3_1: 
NetD5_1: R65.2 X23.1 | length 114.4
  Top Layer w10: R65.2 -2343.71,1896.29 -2307.44,1896.29 -2296.34,1907.39 -2267.39,1907.39 X23.1@-2250,1890
"NetManual Gate_2": R57.1 R61.2 R62.1 X21.1 | length 303.1
  Top Layer w10: R62.1 -2665,970 -2585,1050 X21.1
NetOutput_0: R67.1 X27.1 | length 195.7
  Top Layer w10: X27.1@-1906,1730 -1900,1724 -1809,1724 R67.1
NetQ1_3: Q1.3 R5.2 R6.1 | length 515.2
  Top Layer w10: R6.1 -1052.01,329.25 -1030.51,350.75 -1026.65,350.75 -1026.65,413.35 R5.2
NetQ3_1: Q3.1 R11.2 U1.8 | length 1864.8
  Top Layer w10: Q3.1 -1338.5,1827.31 -1338.5,1850.49 -1327.65,1861.33 -1327.65,1892.35 v2(-1320,1900) ; U1.8 -110,1240 R11.2
  Bottom Layer w10: v2(-1320,1900) -1250.43,1969.57 -975.04,1969.57 -816.32,1810.85 -556.32,1810.85 -300,1554.53 U1.8
NetQ3_2: Q3.2 Q4.2 r4.2 | length 497.8
  Top Layer w10: Q3.2 -1379.69,1891.23 -1334.91,1936 -1305.09,1936 -1279.69,1910.6 -1279.69,1761.63 -1271.56,1753.51 -1173.7,1753.51 -1147.2,1780 r4.2
NetQ6_1: Q6.1 R19.1 R25.1 | length 616.6
  Top Layer w10: Q6.1 -2560.32,222.5 -2477.82,140 R19.1@-2275,140 ; R25.1 -2275,425 -2275,145 R19.1
NetQ6_3: Q6.3 R15.1 R19.2 X4.1 | length 966.6
  Top Layer w10: Q6.3 -2580,171.52 -2509.93,101.44 -2254.03,101.44 -2120,235.47 X4.1 ; R15.1 -2120,350 X4.1 ; R19.2 -2017.36,187.36 -2067.36,187.36 X4.1
NetQ7_2: Q7.2 R47.2 X13.1 | length 1193.9
  Top Layer w10: Q7.2 -2151.28,1506.75 -2246.16,1506.75 -2488.34,1264.57 -2488.34,1048.34 X13.1 -2409.44,980 -2374.88,945.44 -2054.56,945.44 R47.2@-2020,980
NetQ7_3: Q7.3 R41.1 R46.2 | length 1112.8
  Top Layer w10: Q7.3 -2221.34,1480 -2266.73,1434.61 -2266.73,1403.27 R41.1 -2370.28,1360 -2472.34,1257.94 -2472.34,1068.32 -2436.36,1032.34 -2396.87,1032.34 -2325.97,961.44 -2138.56,961.44 R46.2
NetQ8_3: Q8.3 R40.2 R45.2 | length 272.9
  Top Layer w10: Q8.3@-1540,470 -1540,457.4 -1491.94,409.35 -1482.29,409.35 -1455.51,382.56 -1455.51,345.51 R45.2 R40.2
NetQ9_2: Q9.2 R41.2 R54.2 U2.13 X18.1 | length 1601.1
  Top Layer w10: X18.1 -2370,1140 -1970,1140 ; Q9.2 -2177.4,1817.4 -2140,1780 -2050,1780 ; R54.2 -2028.86,1785.86 -2044.14,1785.86 -2050,1780 ; U2.13 -1810.53,1129.47 -1959.47,1129.47 -1970,1140 ; -2050,1780 -2050,1400 -1970,1320 -1970,1140
NetQ9_3: Q9.3 R52.2 | length 512.2
  Top Layer w10: Q9.3@-2142.55,1727.34 -2095.91,1680.7 -2095.91,1355.91 R52.2
NetQ10_1: Q10.1 R62.2 | length 434.6
  Top Layer w10: R62.2 -2811.44,1231.44 -2744.03,1231.44 -2708.56,1266.91 -2708.56,1285.97 -2641.65,1352.88 -2569.06,1352.88 -2560.32,1361.63 Q10.1
NetQ10_2: Q10.2 R57.2 X22.1 | length 588.2
  Top Layer w10: R57.2 -2870.53,1380.53 -2870.53,1416.79 -2788,1499.32 -2669.32,1499.32 ; X22.1 -2669.32,1499.32 ; Q10.2 -2599.69,1428.48 -2662.24,1491.04 -2662.24,1492.24 -2669.32,1499.32
NetR1_2: R2.1 X1.1 | length 493.8
  Top Layer w10: R2.1 -304.56,1895.44 -304.56,1750.03 -242.53,1688 X1.1
NetR2_2: R2.2 R3.1 R11.1 R14.2 R21.2 U1.9 | length 2356.8
  Top Layer w10: R2.2 R21.2 -660.28,1750 -727.57,1682.71 -727.57,1602.57 -488.56,1363.56 -488.56,1324.03 -465.97,1301.44 -426.44,1301.44 -400,1275 U1.9 ; R3.1 -259.47,530.53 -259.47,1099.47 U1.9 ; R11.1@-50,1500 -70,1480 -70,1365.47 -134.03,1301.44 -338.56,1301.44 U1.9
NetR7_1: R7.1 R12.2 U1.5 | length 856.2
  Top Layer w10: R12.2 -761.44,278.56 -761.44,401.44 R7.1
  Bottom Layer w10: R7.1 -650.38,589.62 -650.38,789.62 U1.5
NetR13_1: 
NetR13_2: R14.1 X2.1 | length 340.9
  Top Layer w10: R14.1 -146,1954 -146,2104 X2.1@-115,2135
NetR20_1: 
NetR20_2: R21.1 X5.1 | length 603.3
  Top Layer w10: X5.1 -211.44,2231.44 -211.44,1934.03 -256.91,1888.56 -265.97,1888.56 -288.56,1865.97 -288.56,1788.56 R21.1
NetR26_2: R26.2 U2.5 | length 322.9
  Top Layer w10: U2.5@-1450,850 U2.5 -1462.87,870 -1379.52,786.65 -1379.52,729.52 R26.2
NetR31_1: R31.1 U2.7 | length 1343.6
  Bottom Layer w10: U2.7 -1136.41,870 -1116.98,850.57 -943.96,850.57 -895.06,899.47 -583.21,899.47 -540.53,942.16 -540.53,956.79 -358.12,1139.2 -343.49,1139.2 -150,1332.69 R31.1
NetR31_2: R31.2 R32.1 X7.1 | length 1024.8
  Top Layer w10: R31.2 -350,1440 R32.1 -141.97,1448.03 -141.97,1482.56 -85.97,1538.56 -54.03,1538.56 -31.44,1515.97 -31.44,1118.56 X7.1
NetR38_1: 
NetR38_2: R39.1 X14.1 | length 114.9
  Top Layer w10: X14.1 -1522.21,80 -1462.21,140 R39.1
NetR38_3: 
NetR39_2: R39.2 R40.1 R44.2 | length 487.8
  Top Layer w10: R44.2@-1450,440 -1444,446 -1356,446 R40.1 R39.2
NetR48_2: R48.2 X15.1 | length 187.3
  Top Layer w10: R48.2 -1060,1640 X15.1
NetR50_1: R50.1 X17.1 | length 451.7
  Bottom Layer w10: X17.1 -2465.98,860 -2348.56,977.42 -2348.56,1015.97 -2313.09,1051.44 -2294.03,1051.44 -2271.44,1074.03 -2271.44,1151.44 R50.1
NetR51_2: 
NetR55_2: R55.2 R59.2 R60.1 U2.10 | length 620.2
  Top Layer w10: U2.10 -1411.44,1228.56 -1411.44,1511.44 R55.2 ; R60.1 R59.2
  Bottom Layer w10: R55.2 R60.1
NetR58_1: R58.1 R63.1 R64.1 U2.12 | length 282.4
  Top Layer w10: R58.1@-1750,1240 -1745,1245 -1655,1245 R63.1 ; U2.12 -1660.61,1179.39 -1660.61,1197.18 -1658.63,1199.16 -1658.63,1231.37 R63.1 ; R64.1 R63.1
NetR58_2: R58.2 U2.14 X19.1 | length 428
  Top Layer w10: U2.14 -1875,1175 -1875,1265 X19.1 -1750,1400 R58.2@-1750,1540
NetR67_2: "U Amp.3" R67.2 R68.2 | length 296.7
  Top Layer w10: -1628,1812 -1552,1736 R68.2 -1442.5,1734.5 -1442.5,1657.5 R67.2
pads on no net: Q5.3
copper on no net: | length 2700
  Top Layer w10: -9500,-260 -9500,2440

## Polygon pours and split planes (outlines as drawn)
BN on Bottom Layer "BN_L02_P012" (solid, remove dead copper, pour order 12): -2875,25 -25,25 -25,2325 -2875,2325

## Keep-outs
Keep-Out Layer:
  the board outline again, w10

## Silkscreen, mask and mechanical layers (free items; w line width, h text height)
Top Overlay:
  text "Grounds" at -2560,2290 h30
  text "Noise Toaster / r1.0 / Sam Zeter 2017" at -2150,2190 h30

## Text inside footprints (layer, text, board x,y; h text height)
B1: Top Overlay "+" at -2635.51,1422.72 h45.28 r180